# Altium PCB Dev_BRD_ATTINY1616.PcbDoc
Units mm, origin at the board's own origin, x right, y up, seen from the top; angles counter-clockwise.
Board outline 20 x 35 mm, 2 copper layers (Top Layer, Bottom Layer); 41 components, 24 nets, 96 pads, 54 vias.
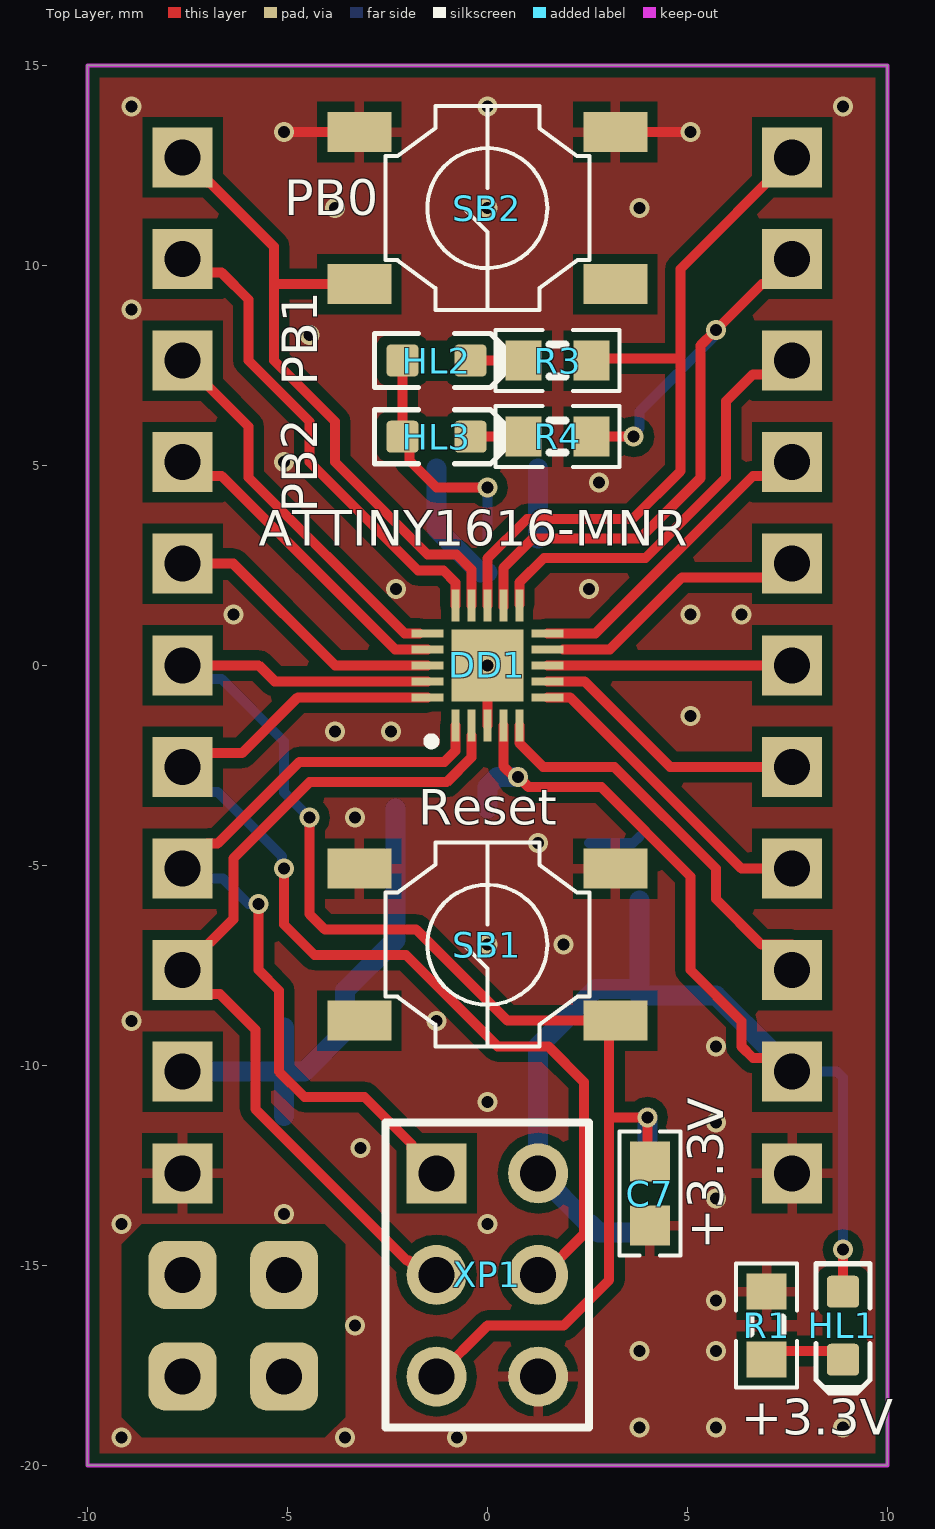
[diagram p0: Top Layer view]
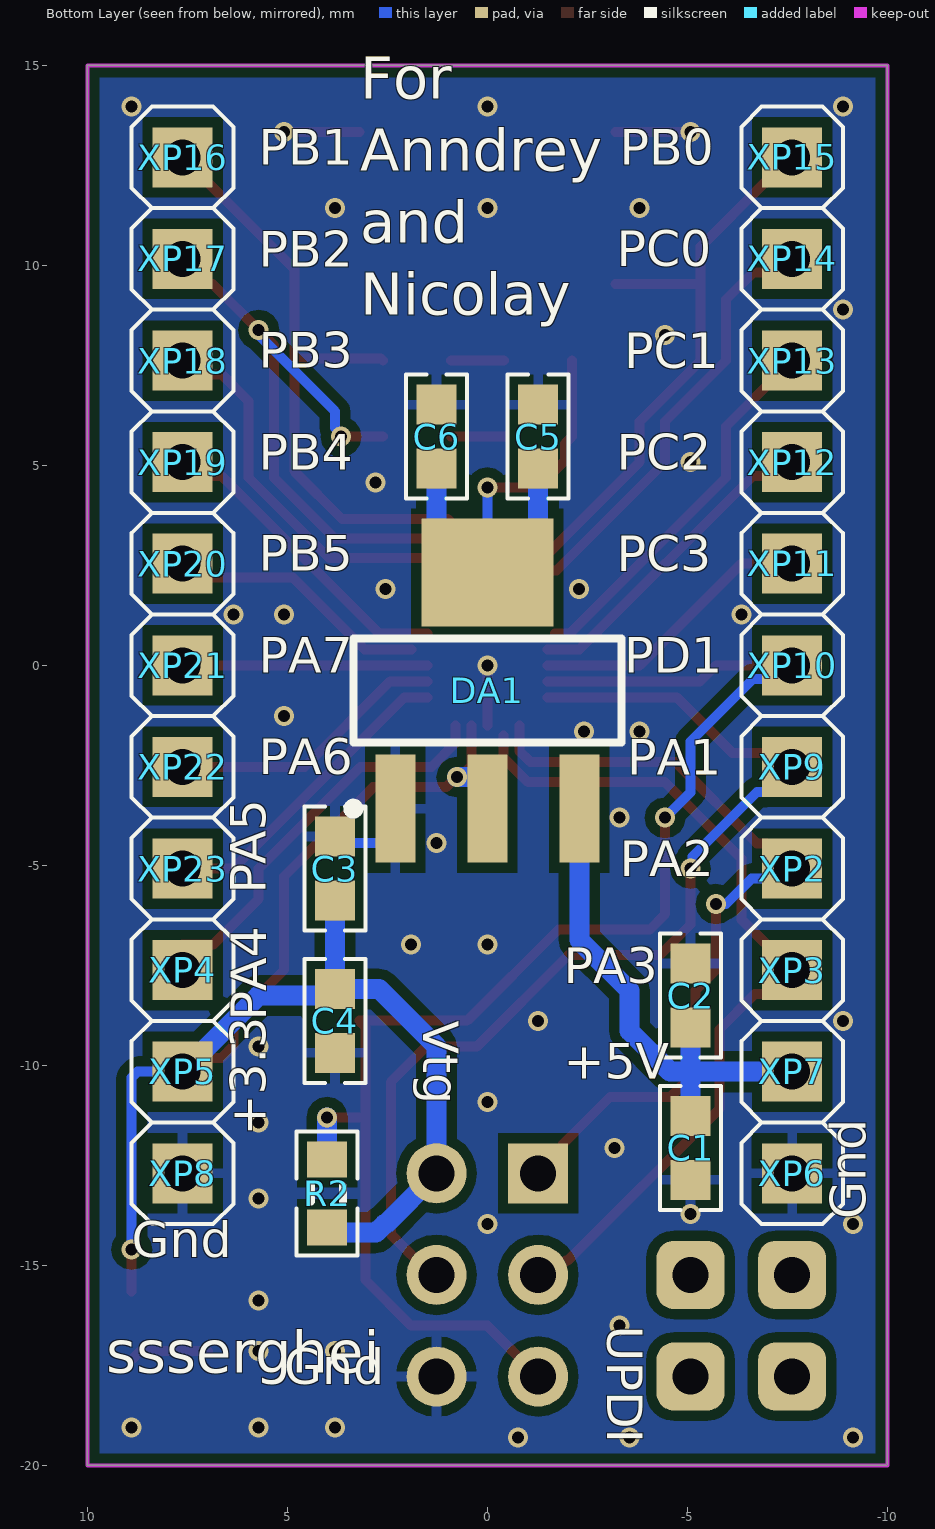
[diagram p1: Bottom Layer view, seen from below]
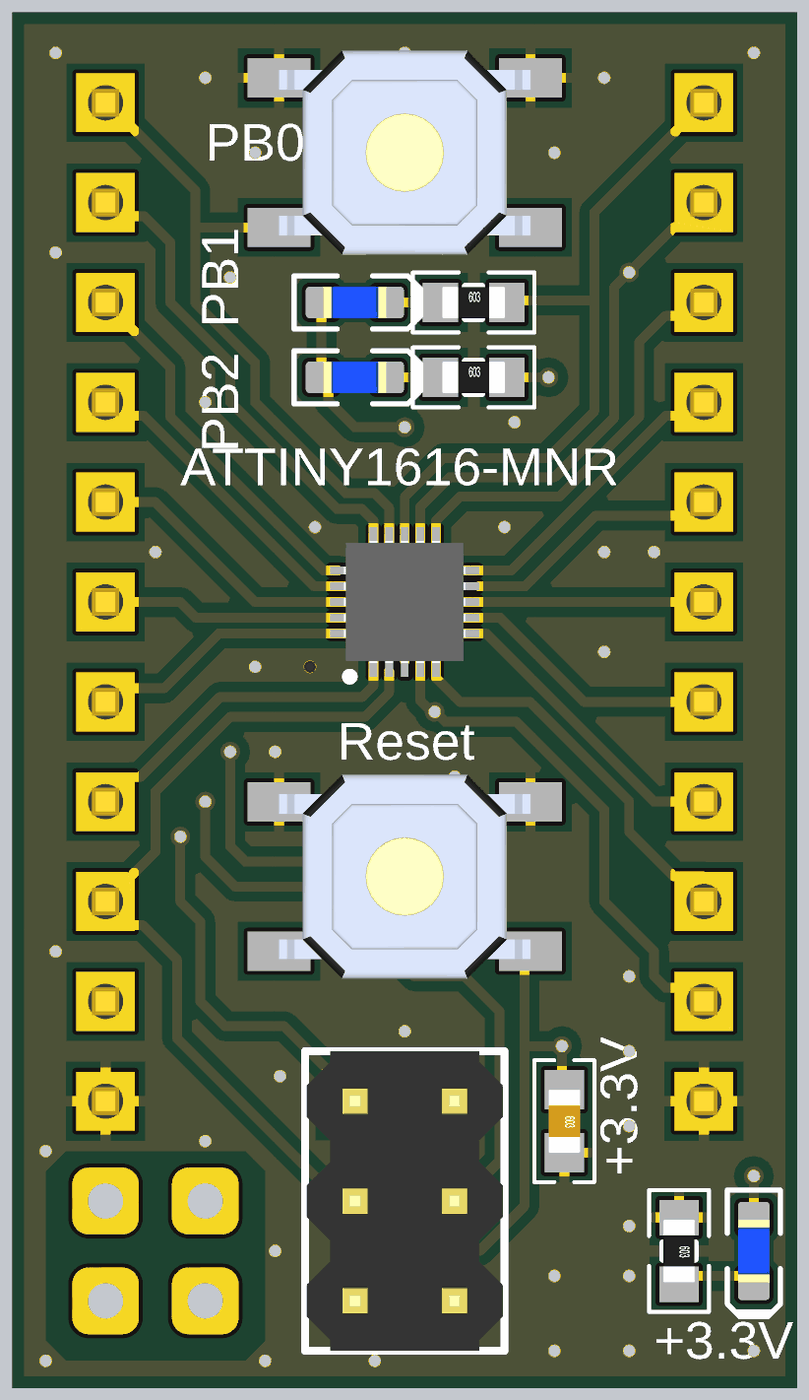
[diagram p2: 3D render of the assembled board from above, using the file's embedded part models]
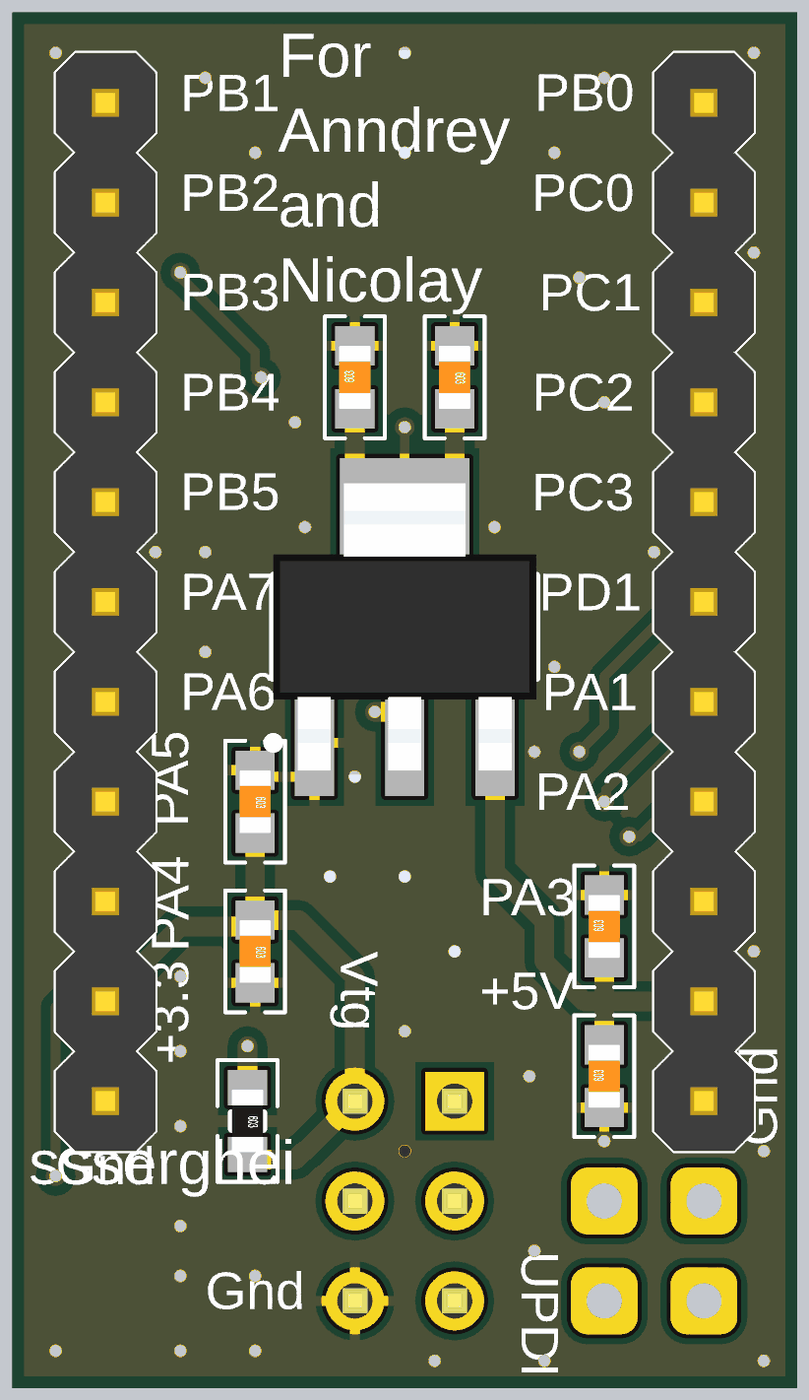
[diagram p3: 3D render of the assembled board from below, using the file's embedded part models]

## Layer stack, top to bottom
Top Solder: solder mask 0.0102, Solder Resist, Dk 3.5
Top Layer: signal copper 0.0356
Dielectric 1: dielectric 0.32, FR-4, Dk 4.8
Bottom Layer: signal copper 0.0356
Bottom Solder: solder mask 0.0102, Solder Resist, Dk 3.5

## Board outline
-10,-20 10,-20 10,15 -10,15

## Design rules (kind name [scope] priority, off if disabled: settings)
Clearance Clearance_1 [InPolygon] p1: gap=0.25 ignorepadtopadclearanceinfootprint=FALSE except(0: Arc-Hole Track-Hole SMDPad-Hole THPad-Hole Via-Hole Fill-Hole Poly-Hole Region-Hole Text-Hole)
Clearance [All] p2: gap=0.15 ignorepadtopadclearanceinfootprint=FALSE except(0: Arc-Hole Track-Hole SMDPad-Hole THPad-Hole Via-Hole Fill-Hole Poly-Hole Region-Hole Text-Hole)
PolygonConnect [All] p1: thpad.connectstyle=Relief thpad.reliefconductorwidth=0.254 thpad.reliefentries=4 thpad.polygonreliefangle="90 Angle" thpad.airgapwidth=0.254 smdpad.connectstyle=Relief smdpad.reliefconductorwidth=0.254 smdpad.reliefentries=4 smdpad.polygonreliefangle="90 Angle" smdpad.airgapwidth=0.254 via.connectstyle=Direct via.reliefconductorwidth=0.254 via.reliefentries=4 via.polygonreliefangle="90 Angle" via.airgapwidth=0.254
RoutingVias [All] p1: holewidth=0.5 width=0.8 viastyle="Through Hole" minholewidth=0.3 minwidth=0.5 maxholewidth=0.8 maxwidth=1.2
SolderMaskExpansion [All] p1: expansion=0.102 istentingtop=FALSE
Width [All] p1: maxlimit=0.5 minlimit=0.15 preferedwidth=0.25
30 further rules are at their usual default settings.

## Components (designator, comment, footprint, x,y, rotation, side; value= is the part's Value field where it differs from the comment)
C1 "10u 10V" CAPC1608(0603)N -5.08,-12.065 r90 bottom
C2 "0.1u 50V" CAPC1608(0603)N -5.08,-8.255 r90 bottom
C3 "10u 10V" CAPC1608(0603)N 3.81,-5.08 r270 bottom
C4 "0.1u 50V" CAPC1608(0603)N 3.81,-8.89 r270 bottom
C5 "10u 10V" CAPC1608(0603)N -1.27,5.715 r270 bottom
C6 "0.1u 50V" CAPC1608(0603)N 1.27,5.715 r90 bottom
C7 "0.1u 50V" CAPC1608(0603)N 4.064,-13.208 r270 top
DA1 "LD1117S33T" SOT223_M 0,-0.635 r90 bottom
DD1 "ATTINY1616-MNR" QFN40P300X300X90-21N 0,0 r90 top
HL1 "Bl 0603" LED-0603-BLUE 8.89,-16.51 r270 top
HL2 "Bl 0603" LED-0603-BLUE -1.27,7.62 r0 top
HL3 "Bl 0603" LED-0603-BLUE -1.27,5.715 r0 top
R1 "100  1%" RESC1608(0603)N 6.985,-16.51 r270 top
R2 "10k" RESC1608(0603)N 4.005,-13.204 r270 bottom
R3 "100  1%" RESC1608(0603)N 1.755,7.62 r0 top
R4 "100  1%" RESC1608(0603)N 1.755,5.715 r0 top
SB1 "PTS525SM15SMTR2 LFS" "TACT_SWITCH KPT1187B" 0,-6.985 r180 top locked
SB2 "PTS525SM15SMTR2 LFS" "TACT_SWITCH KPT1187B" 0,11.43 r180 top
XP1 "PLD-6" PLD-6-3D -1.27,-12.7 r270 top
XP2 "PLS-1" PLS-1-3D -7.62,-5.08 r180 bottom
XP3 "PLS-1" PLS-1-3D -7.62,-7.62 r180 bottom
XP4 "PLS-1" PLS-1-3D 7.62,-7.62 r90 bottom
XP5 "PLS-1" PLS-1-3D 7.62,-10.16 r90 bottom
XP6 "PLS-1" PLS-1-3D -7.62,-12.7 r90 bottom
XP7 "PLS-1" PLS-1-3D -7.62,-10.16 r90 bottom
XP8 "PLS-1" PLS-1-3D 7.62,-12.7 r90 bottom
XP9 "PLS-1" PLS-1-3D -7.62,-2.54 r180 bottom
XP10 "PLS-1" PLS-1-3D -7.62,0 r180 bottom
XP11 "PLS-1" PLS-1-3D -7.62,2.54 r180 bottom
XP12 "PLS-1" PLS-1-3D -7.62,5.08 r180 bottom
XP13 "PLS-1" PLS-1-3D -7.62,7.62 r180 bottom
XP14 "PLS-1" PLS-1-3D -7.62,10.16 r180 bottom
XP15 "PLS-1" PLS-1-3D -7.62,12.7 r180 bottom
XP16 "PLS-1" PLS-1-3D 7.62,12.7 r90 bottom
XP17 "PLS-1" PLS-1-3D 7.62,10.16 r90 bottom
XP18 "PLS-1" PLS-1-3D 7.62,7.62 r90 bottom
XP19 "PLS-1" PLS-1-3D 7.62,5.08 r90 bottom
XP20 "PLS-1" PLS-1-3D 7.62,2.54 r90 bottom
XP21 "PLS-1" PLS-1-3D 7.62,0 r90 bottom
XP22 "PLS-1" PLS-1-3D 7.62,-2.54 r90 bottom
XP23 "PLS-1" PLS-1-3D 7.62,-5.08 r90 bottom

## Footprints (in the part's own frame and the unit in brackets; to place one, negate y for a bottom-side part, rotate by r counter-clockwise, add the part's x,y. Pads: shape width x height; smd on the part's side, far side on the other; paste and mask are expansions set on the pad)
CAPC1608(0603)N [mm] "Chip Capacitor, Body 1.6x0.8mm, IPC Medium Density"
  rect 1x1 smd: 1(-0.8,0) 2(0.8,0)
  silkscreen extent -1.55,-0.76 1.55,0.76, body extent -0.8,-0.4 0.8,0.4, height 0.3
LED-0603-BLUE [mm]
  round 0.254 on Mech15: 0(0,0)
  rrect25% 0.8x0.8 smd: A(-0.85,0) K(0.85,0)
  Top Layer pour cut-out: -0.5,0.5 0.5,0.5 0.5,-0.5 -0.5,-0.5
  silkscreen extent -1.55,-0.67 1.68,0.67, body extent -0.8,-0.4 0.8,0.4, height 0.75
PLD-6-3D [mm] "Connector; Header; 3x2 Position"
  rect 1.5x1.5 hole 0.9: 1(0,0)
  round 1.5 hole 0.9: 2(0,2.54) 3(2.54,0) 4(2.54,2.54) 5(5.08,0) 6(5.08,2.54)
  silkscreen extent -1.27,-1.27 6.35,3.81, body extent -1.27,-1.23 6.35,3.77, height 8.4
PLS-1-3D [mm] "Connector; Header; 1 Position"
  rect 1.5x1.5 hole 0.9: 1(0,0)
  silkscreen extent -1.27,-1.27 1.27,1.27, body extent -1.27,-1.27 1.27,1.27, height 8.44
QFN40P300X300X90-21N [mm]
  rect 0.8x0.2 smd: 1(-1.5,0.8) 2(-1.5,0.4) 3(-1.5,0) 4(-1.5,-0.4) 5(-1.5,-0.8) 11(1.5,-0.8) 12(1.5,-0.4) 13(1.5,0) 14(1.5,0.4) 15(1.5,0.8)
  rect 0.2x0.8 smd: 6(-0.8,-1.5) 7(-0.4,-1.5) 8(0,-1.5) 9(0.4,-1.5) 10(0.8,-1.5) 16(0.8,1.5) 17(0.4,1.5) 18(0,1.5) 19(-0.4,1.5) 20(-0.8,1.5)
  rect 1.8x1.8 smd: 21(0,0)
  silkscreen extent -2,1.3 -1.8,1.5, body extent -1.55,-1.55 1.55,1.55, height 0.9
RESC1608(0603)N [mm] "Chip Resistor, Body 1.6x0.8mm, IPC Medium Density"
  rect 0.9x1 smd: 1(-0.85,0) 2(0.85,0)
  silkscreen extent -1.55,-0.76 1.55,0.76, body extent -0.8,-0.4 0.8,0.4, height 0.3
SOT223_M [mm] "SOT223, 4-Leads, Body 6.5x3.5mm, Pitch 2.3mm, Lead Span 7mm, IPC Low Density"
  rect 2.7x1 smd: 1(-2.95,2.3) 2(-2.95,0) 3(-2.95,-2.3)
  rect 2.7x3.3 smd: 4(2.95,0)
  silkscreen extent -3.07,-3.35 1.3,3.48, body extent -3.65,-3.35 3.65,3.35, height 1.7
"TACT_SWITCH KPT1187B" [mm] "SMD_Button 5.2x5.2x1.6"
  rect 1.6x1 smd: 1(-3.2,1.9) 1(3.2,1.9) 2(-3.2,-1.9) 2(3.2,-1.9)
  silkscreen extent -2.55,-2.55 2.55,2.55, body extent -3.2,-2.6 3.2,2.6, height 1.5

## Part data
C1 C3 C5: library part GRM188R61A106KE69J, "10uF 0603 10V X5R  10%", Mouser Part Number=81-GRM188R61A106KE9J, Package=0603, HelpURL=https://www.mouser.co.uk/ProductDetail/Murata-Electronics/GRM188R61A106KE69J?qs=sGAEpiMZZMsh%252B1woXyUXj%252BiP5dSPIHTFTsepvKq1jks%3D, Manufacturer Part Number=GRM188R61A106KE69J, Part Number=GRM188R61A106KE69J, Price$=0.037
C2 C4 C6 C7: library part UMF107B7104MAHT, "0,1uF 0603 50V X7R  +/-20%", Mouser Part Number=963-UMF107B7104MAHT, Package=0603, HelpURL=https://www.mouser.com/ProductDetail/Taiyo-Yuden/UMF107B7104MAHT?qs=%252B6g0mu59x7IXaZoRIc0z4w%3D%3D, Manufacturer Part Number=UMF107B7104MAHT, Part Number=UMF107B7104MAHT, Price$=0.043
DA1: "LDO Voltage Regulators 3.3V 0.8A Positive", HelpURL=http://www.mouser.com/ds/2/389/CD00000544-310772.pdf, Part Number=LD1117S33T
DD1: "AVR tinyAVR™ 1 Microcontroller IC 8-Bit 20MHz 16KB (16K x 8) FLASH 20-VQFN (3x3)", Digi-Key Part Number=ATTINY1616-MNRCT-ND, Manufacturer_Name=Microchip, Mouser Part Number=556-ATTINY1616MNR, Package=VQFN-20, Arrow Part Number=ATTINY1616-MNR, Arrow Price/Stock=https://www.arrow.com/en/products/attiny1616-mnr/microchip-technology, Datasheet Link=http://ww1.microchip.com/downloads/en/DeviceDoc/ATtiny3216_ATtiny1616-data-sheet-40001997B.pdf, Height=0.9mm, HelpURL=https://www.digikey.com/product-detail/en/microchip-technology/ATTINY1616-MNR/ATTINY1616-MNRCT-ND/7354428, Manufacturer Part Number=ATTINY1616-MNR, Manufacturer_Part_Number=ATTINY1616-MNR, Mouser Price/Stock=https://www.mouser.co.uk/ProductDetail/Microchip-Technology-Atmel/ATTINY1616-MNR?qs=HXFqYaX1Q2yKNpuKQU9qww%3D%3D, Part Number=ATTINY1616-MNR
HL1 HL2 HL3: library part 150060BS55040, "LED BLUE DIFFUSED 0603 SMD", Digi-Key Part Number=732-12013-1-ND, Package=0603, HelpURL=https://www.digikey.com/products/en?keywords=732-12013-1-ND, Manufacturer Part Number=150060BS55040, Part Number=150060BS55040
R1 R3 R4: library part RT0603FRD07100RL, "RES SMD 0603 100  1% 25ppm", Mouser Part Number=603-RT0603FRD07100RL, Package=0603, HelpURL=https://eu.mouser.com/ProductDetail/Yageo/RT0603FRD07100RL?qs=sGAEpiMZZMvdGkrng054t8YHmJ3TQuBivymLOjykzWA%3D, Manufacturer Part Number=RT0603FRD07100RL, Part Number=RT0603FRD07100RL
R2: library part RC0603JR-0710KL, "RES SMD 0603 10k 5% 100ppm", Mouser Part Number=603-RC0603JR-0710KL, Package=0603, HelpURL=https://eu.mouser.com/ProductDetail/Yageo/RC0603JR-0710KL?qs=ksOUTF%2FWcd8D6T22BJkQ7g%3D%3D, Manufacturer Part Number=RC0603JR-0710KL, Part Number=RC0603JR-0710KL
SB1 SB2: "SWITCH TACTILE SPST-NO 0.02A 15V", Digi-Key Part Number=CKN9104CT-ND, HelpURL=https://www.digikey.com/products/en?keywords=CKN9104CT-ND, Manufacturer Part Number="PTS525SM15SMTR2 LFS", Part Number="PTS525SM15SMTR2 LFS", Price$=0.33
XP2 XP3 XP4 XP5 XP6 XP7 XP8 XP9 XP10 XP11 XP12 XP13 XP14 XP15 XP16 XP17 XP18 XP19 XP20 XP21 XP22 XP23: "CONN HEADER VERT 1POS", Digi-Key Part Number=S1011EC-01-ND, Manufacturer Part Number=PRPC001SAAN-RC, HelpURL=https://www.digikey.com/product-detail/en/sullins-connector-solutions/PRPC001SAAN-RC/S1011EC-01-ND/2775253, Part Number=PLS-1, Price$=0.05
XP1: Part Number=PLD-6

## Free pads (board coordinates)
  rrect50% 1.7x1.7 hole 0.9: 0(-7.62,-17.78) 0(-7.62,-15.24) 0(-5.08,-17.78) 0(-5.08,-15.24)

## Via types
v1: diameter 0.5, hole 0.3, Top Layer to Bottom Layer, tented both sides, 54 vias

## Nets (pads, with @x,y where several pads share a name; then routed paths per layer and width w, separated by ;. In a path a pad name is that pad's centre, name@x,y a point inside that pad or via, vN(x,y) a via of type N, cw(c..) or ccw(c..) an arc to the next point about the centre after c; other vN are vias at no path point)
+3.3V: C3.2 C4.1 C5.2 C6.1 DA1.2 DA1.4 DD1.4 HL1.A HL2.A HL3.A R2.2 XP1.2 XP5.1 | length 48.8
  Top Layer w0.25: HL2.A HL3.A -1.944,5.539 -1.944,5.119 -1.27,4.445 v1(0,4.445) ; DD1.4 0.4,-2.521 0.673,-2.794 0.781,-2.794 1.035,-3.048 2.852,-3.048 5.08,-5.276 5.08,-7.62 6.35,-8.89 6.35,-9.525 6.641,-9.816 7.276,-9.816 XP5.1 ; HL1.A v1(8.89,-14.605)
  Bottom Layer w0.25: DA1.4@0,3.175 v1(0,4.445) ; XP5.1 8.744,-10.16 8.89,-10.306 v1(8.89,-14.605)
  Bottom Layer w0.5: C5.2 -1.27,3.415 -0.17,2.315 DA1.4 ; DA1.2 0,-3.044 0.25,-2.794 v1(0.762,-2.794) ; DA1.4@1.27,3.175 C6.1 ; C4.1@3.81,-8.255 5.715,-8.255 7.12,-9.66 XP5.1 ; C3.2 C4.1 2.705,-8.09 1.27,-9.525 XP1.2 2.54,-13.97 2.571,-13.97 2.786,-14.185 3.874,-14.185 R2.2
+5V: C1.2 C2.1 DA1.3 XP7.1 | length 12.8
  Bottom Layer w0.5: XP7.1 -5.08,-10.16 ; C1.2 -5.08,-10.16 ; C2.1 -5.08,-10.16 ; DA1.3 -2.3,-6.872 -3.556,-8.128 -3.556,-9.144 -4.572,-10.16 -5.08,-10.16
But1: DD1.14 SB2.1 XP15.1 | length 16.6
  Top Layer w0.25: XP15.1@-7.874,12.954 XP15.1 ; XP15.1@-7.239,12.319 -6.995,12.075 -6.945,12.075 -5.334,10.464 -5.334,9.525 ; SB2.1@-3.2,9.53 -5.329,9.53 -5.334,9.525 ; DD1.14 -0.4,2.394 -0.774,2.768 -1.498,2.768 -3.81,5.08 -3.81,6.096 -5.334,7.62 -5.334,9.525
GND: C1.1 C2.2 C3.1 C4.2 C5.1 C6.2 C7.2 DA1.1 DD1.3 DD1.21 R1.1 SB1.2 SB2.2 XP1.6 XP6.1 XP8.1 | length 6.3
  Top Layer w0.25: v1(-5.08,13.335) -5.069,13.335 -5.064,13.33 SB2.2@-3.2,13.33 ; DD1.3 DD1.21@0,-0.254 ; SB2.2@3.2,13.33 3.205,13.335 v1(5.08,13.335)
  Bottom Layer w0.25: DA1.1@2.54,-4.445 3.645,-4.445 C3.1
  other v1: -9.144,-19.304 -3.556,-19.304 -0.762,-19.304 3.81,-19.05 5.715,-19.05 8.89,-19.05 3.81,-17.145 5.715,-17.145 -3.302,-16.51 5.715,-15.875 -9.144,-13.97 0,-13.97 -5.08,-13.716 5.715,-13.335 -3.175,-12.065 5.715,-11.43 0,-10.922 5.715,-9.525 -8.89,-8.89 -1.27,-8.89 0,-6.985 1.905,-6.985 1.27,-4.445 -3.302,-3.81 -3.81,-1.651 -2.413,-1.651 5.08,-1.27 0,0 -6.35,1.27 5.08,1.27 6.35,1.27 -2.286,1.905 2.54,1.905 2.794,4.572 -5.08,5.08 -4.445,8.255 -8.89,8.89 -3.81,11.43 0,11.43 3.81,11.43 -8.89,13.97 0,13.97 8.89,13.97
LED1: DD1.13 R3.2 XP16.1 | length 18.1
  Top Layer w0.25: DD1.13 0,2.667 0.99,3.657 3.631,3.657 4.826,4.852 4.826,7.67 ; R3.2 2.655,7.67 4.826,7.67 ; 4.826,8.382 4.826,7.67 ; 4.826,8.401 4.826,9.906 XP16.1
LED2: DD1.12 R4.2 XP17.1 | length 17.9
  Top Layer w0.25: DD1.12@0.4,1.457 0.4,2.432 1.143,3.175 3.82,3.175 5.334,4.689 5.334,8.001 5.651,8.319 6.868,9.535 6.995,9.535 XP17.1 ; R4.2 v1(3.66,5.715)
  Bottom Layer w0.25: v1(3.66,5.715) 3.66,5.783 3.81,5.933 3.81,6.35 5.715,8.255 v1(5.715,8.382)
NetDD1_1: DD1.1 XP1.1 XP2.1 | length 20.4
  Top Layer w0.25: XP2.1 -6.995,-4.455 -6.741,-4.455 -4.699,-2.413 -1.074,-2.413 -0.8,-2.139 DD1.1 ; v1(-5.715,-5.969) -5.715,-7.62 -5.207,-8.128 -5.207,-10.16 -4.572,-10.795 -3.545,-10.795 -3.068,-10.795 -1.895,-11.968 -1.895,-12.075 XP1.1
  Bottom Layer w0.25: XP2.1 -7.366,-5.334 -6.604,-5.334 -5.969,-5.969 v1(-5.715,-5.969)
NetDD1_2: DD1.2 XP1.3 XP3.1 | length 21.4
  Top Layer w0.25: XP3.1 -7.022,-8.218 -6.687,-8.218 -5.802,-9.104 -5.802,-11.089 -2.006,-14.885 -1.963,-14.885 -1.608,-15.24 XP1.3 ; XP3.1@-7.556,-7.556 -6.35,-6.35 -6.35,-4.826 -4.445,-2.921 -1.016,-2.921 -0.4,-2.305 DD1.2@-0.4,-1.753
NetDD1_5: DD1.5 XP4.1 | length 9.8
  Top Layer w0.25: DD1.5 0.8,-1.943 1.397,-2.54 3.175,-2.54 5.715,-5.08 5.715,-5.842 6.858,-6.985 XP4.1@7.62,-6.985
NetDD1_6: DD1.6 XP23.1 | length 7.9
  Top Layer w0.25: DD1.6 2.07,-0.8 6.35,-5.08 XP23.1
NetDD1_7: DD1.7 XP22.1 | length 7
  Top Layer w0.25: DD1.7 2.432,-0.4 4.572,-2.54 XP22.1
NetDD1_8: DD1.8 XP21.1 | length 6.1
  Top Layer w0.25: DD1.8 XP21.1
NetDD1_9: DD1.9 XP20.1 | length 6.6
  Top Layer w0.25: DD1.9@1.896,0.4 2.305,0.4 3.067,0.4 4.863,2.196 7.276,2.196 XP20.1
NetDD1_10: DD1.10 XP19.1 | length 7.9
  Top Layer w0.25: DD1.10 2.705,0.8 6.641,4.736 7.276,4.736 XP19.1
NetDD1_11: DD1.11 XP18.1 | length 10.8
  Top Layer w0.25: DD1.11@0.8,1.524 0.8,2.07 1.416,2.686 3.956,2.686 5.969,4.699 5.969,6.604 6.641,7.276 7.276,7.276 XP18.1
NetDD1_15: DD1.15 XP14.1 | length 12.2
  Top Layer w0.25: XP14.1 -7.276,9.816 -6.641,9.816 -5.969,9.144 -5.969,7.62 -4.445,6.096 -4.445,5.08 -1.733,2.368 -1.098,2.368 -0.8,2.07 DD1.15
NetDD1_16: DD1.16 XP13.1 | length 9.5
  Top Layer w0.25: XP13.1 -5.969,5.969 -5.969,4.699 -2.07,0.8 DD1.16@-1.691,0.8
NetDD1_17: DD1.17 XP12.1 | length 7.6
  Top Layer w0.25: XP12.1@-7.112,4.963 -7.112,4.853 -6.995,4.736 -6.641,4.736 -2.305,0.4 DD1.17
NetDD1_18: DD1.18 XP11.1 | length 7.2
  Top Layer w0.25: XP11.1 -6.35,2.54 -3.81,0 DD1.18
NetDD1_20: DD1.20 XP1.4 XP9.1 | length 25.9
  Top Layer w0.25: XP9.1@-7.112,-2.313 -6.995,-2.196 -6.133,-2.196 -4.737,-0.8 DD1.20 ; v1(-5.08,-5.08) -5.08,-6.477 -4.318,-7.239 -2.032,-7.239 0.254,-9.525 1.524,-9.525 2.413,-10.414 2.413,-14.224 1.397,-15.24 XP1.4
  Bottom Layer w0.25: XP9.1 -6.995,-3.165 -6.741,-3.165 -5.128,-4.778 -5.128,-5.032 v1(-5.08,-5.08)
NetHL1_K: HL1.K R1.2 | length 2
  Top Layer w0.25: R1.2@6.985,-17.145 8.675,-17.145 HL1.K
NetHL2_K: HL2.K R3.1 | length 1.3
  Top Layer w0.25: HL2.K R3.1
NetHL3_K: HL3.K R4.1 | length 1.3
  Top Layer w0.25: HL3.K R4.1
Reset: C7.1 DD1.19 R2.1 SB1.1 XP1.5 XP10.1 | length 37.7
  Top Layer w0.25: XP10.1@-7.493,0 -5.715,0 -5.315,-0.4 DD1.19 ; v1(-4.445,-3.81) -4.445,-6.223 -4.064,-6.604 -1.778,-6.604 0.503,-8.885 3.2,-8.885 3.048,-9.037 3.048,-11.299 ; XP1.5 0,-16.51 1.905,-16.51 3.048,-15.367 3.048,-11.299 ; C7.1 4.005,-12.349 v1(4.005,-11.299) 3.048,-11.299
  Bottom Layer w0.25: XP10.1 -7.276,-0.344 -6.641,-0.344 -5.08,-1.905 -5.08,-3.175 v1(-4.445,-3.81)
  Bottom Layer w0.5: R2.1@4.005,-12.188 v1(4.005,-11.299)
pads on no net: HL1.0 HL2.0 HL3.0

## Polygon pours and split planes (outlines as drawn)
GND on Top Layer "GND_L01_P000" (solid, remove dead copper, pour order 0): -10,15 10,15 10,-20 -10,-20
GND on Bottom Layer "GND_L02_P001" (solid, remove dead copper, pour order 1): -10,15 10,15 10,-20 -10,-20

## Keep-outs
Keep-Out Layer:
  the board outline again, w0.1

## Other copper
Top Layer:
  pour cut-out: -8.636,-13.97 -9.144,-14.478 -9.144,-18.796 -8.636,-19.304 -4.064,-19.304 -3.556,-18.796 -3.556,-14.478 -4.064,-13.97

## Silkscreen, mask and mechanical layers (free items; w line width, h text height)
Top Overlay:
  text "PB0" at -5.08,10.949 h1.52
  text "PB1" at -3.955,6.985 h1.52 r90
  text "PB2" at -3.955,3.81 h1.52 r90
  text "ATTINY1616-MNR" at -5.711,2.694 h1.52
  text "Reset" at -1.721,-4.29 h1.52
  text "+3.3V" at 6.196,-14.605 h1.52 r90
  text "+3.3V" at 6.35,-19.531 h1.52
Bottom Overlay:
  text "PB0" at -3.309,12.219 h1.52
  text "PB1" at 5.715,12.21 h1.52
  text "PC0" at -3.234,9.672 h1.52
  text "PB2" at 5.715,9.67 h1.52
  text "For  / Anndrey  / and  / Nicolay" at 3.175,8.415 h1.8
  text "PC1" at -3.42,7.132 h1.52
  text "PB3" at 5.715,7.139 h1.52
  text "PC2" at -3.241,4.592 h1.52
  text "PB4" at 5.715,4.592 h1.52
  text "PC3" at -3.231,2.052 h1.52
  text "PB5" at 5.715,2.061 h1.52
  text "PD1" at -3.42,-0.49 h1.52
  text "PA7" at 5.715,-0.488 h1.52
  text "PA1" at -3.495,-3.03 h1.52
  text "PA6" at 5.715,-3.021 h1.52
  text "PA2" at -3.316,-5.57 h1.52
  text "PA5" at 5.236,-5.715 h1.52 r270
  text "PA3" at -1.905,-8.254 h1.52
  text "Vtg" at 1.905,-8.89 h1.52 r90
  text "PA4" at 5.227,-8.89 h1.52 r270
  text "+5V" at -1.905,-10.639 h1.52
  text "+3.3" at 5.234,-11.761 h1.52 r270
  text "Gnd" at -9.759,-13.843 h1.52 r270
  text "Gnd" at 8.89,-15.093 h1.52
  text "UPDI" at -2.696,-16.51 h1.52 r90
  text "ssserghei" at 9.525,-18.03 h1.8
  text "Gnd" at 5.08,-18.268 h1.52

## Dimensions
10,15 to 10,-20 on Dimensions
-10,15 to 10,15 on Dimensions